# EAGLE board 16-pin-rocketbus-cable (EAGLE 6.2)
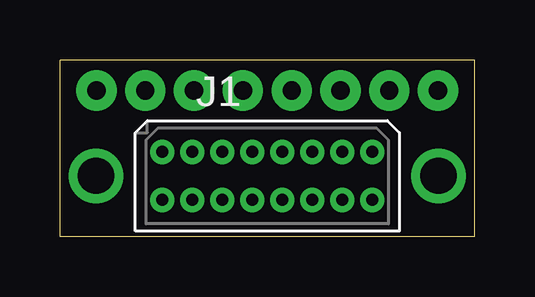
[diagram p0: board, top side]
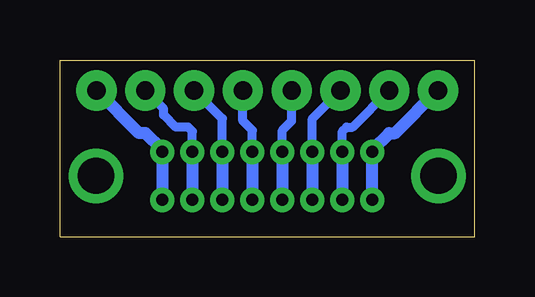
[diagram p1: board, bottom side, seen from below]

Size 17.27 x 7.37 mm. Coordinates in mm from the lower left corner, seen from the top.
Outline: 17.27,0 17.27,7.37 0,7.37 0,0 17.27,0
Copper layers (1*16): Top 0.0178mm / dielectric 59mil / Bottom 0.0178mm
Design rules: minimum track width 6mil, minimum drill 14mil, track to track 6mil, track to pad 6mil, pad to pad 6mil, via to via 6mil, smd to smd 6mil, copper to edge 20mil, drill to drill 16mil, minimum pad ring 8mil, minimum via ring 8mil, stop-mask expansion 3mil, vias tented up to drill 0mil, thermal gap 10mil

## Footprints (pad centres in the part's own frame; a part is rotated, then mirrored left to right if it is on the bottom)
ROCKETBUS-RECEPTACLE = drill 0.508 pad 1.016: AUX1@11 -1.875,1; AUX1@12 -1.875,-1; AUX2@13 -3.125,1; AUX2@14 -3.125,-1; B+@1 4.375,1; B+@2 4.375,-1; B-@15 -4.375,1; B-@16 -4.375,-1; CAN_H@3 3.125,1; CAN_H@4 3.125,-1; CAN_L@5 1.875,1; CAN_L@6 1.875,-1; USB_H@7 0.625,1; USB_H@8 0.625,-1; USB_L@9 -0.625,1; USB_L@10 -0.625,-1 | drill 1.511: CHASSIS@1 7.136,0; CHASSIS@2 -7.136,0

## Placement (x,y rotation side)
J1  ROCKETBUS-RECEPTACLE  [ROCKETBUS-RECEPTACLE]  8.64,2.54 0 top

## Library data of the parts
J1 = rocketbus

## Nets
AUX1: J1.AUX1@11 J1.AUX1@12
AUX2: J1.AUX2@13 J1.AUX2@14
B+: J1.B+@1 J1.B+@2
CAN_H: J1.CAN_H@3 J1.CAN_H@4
CAN_L: J1.CAN_L@5 J1.CAN_L@6
GND: J1.B-@15 J1.B-@16
USB1_D+: J1.USB_H@7 J1.USB_H@8
USB1_L: J1.USB_L@9 J1.USB_L@10

## Tracks (layer width: path | path; a pad name or v marks a point on that pad's centre or on a via)
AUX1  (via drill 0.76 pad 1.68)
  Bottom 0.381: v5.59,6.1 6.76,4.92 J1.AUX1@11
  Bottom 0.508: J1.AUX1@11 J1.AUX1@12
AUX2  (via drill 0.76 pad 1.68)
  Bottom 0.381: v3.56,6.1 5.08,4.57 5.33,4.57 5.51,4.39 J1.AUX2@13
  Bottom 0.508: J1.AUX2@13 J1.AUX2@14
B+  (via drill 0.76 pad 1.68)
  Bottom 0.508: J1.B+@2 J1.B+@1 13.04,3.64 13.72,4.32 13.97,4.32 v15.75,6.1
CAN_H  (via drill 0.76 pad 1.68)
  Bottom 0.381: v13.72,6.1 12.95,5.33 12.95,5.08 12.45,4.57 11.94,4.57 11.76,4.39 J1.CAN_H@3
  Bottom 0.508: J1.CAN_H@3 J1.CAN_H@4
CAN_L  (via drill 0.76 pad 1.68)
  Bottom 0.381: J1.CAN_L@5 10.51,4.92 v11.68,6.1
  Bottom 0.508: J1.CAN_L@5 J1.CAN_L@6
GND  (via drill 0.76 pad 1.68)
  Bottom 0.508: J1.B-@16 J1.B-@15 4.23,3.64 3.56,4.32 3.3,4.32 v1.52,6.1
USB1_D+  (via drill 0.76 pad 1.68)
  Bottom 0.381: v9.65,6.1 9.65,4.83 9.26,4.43 J1.USB_H@7
  Bottom 0.508: J1.USB_H@7 J1.USB_H@8
USB1_L  (via drill 0.76 pad 1.68)
  Bottom 0.381: v7.62,6.1 7.62,4.83 8.01,4.43 J1.USB_L@9
  Bottom 0.508: J1.USB_L@9 J1.USB_L@10

## Text on the board
Document: TOP VIEW (JST CONNECTOR FACING UP) | GND | AUX2 | AUX1 | USB1_D- | USB1_D+ | CAN_L | CAN_H | B+